# Altium PCB Banker_EDGE_2_DSUB.PCBDOC
Units mm, origin at the board's own origin, x right, y up, seen from the top; angles counter-clockwise.
Board outline 21.4 x 72.8 mm, 2 copper layers (Top, Bot), stack 1.571 mm thick; 15 components, 25 nets, 67 pads, 46 vias.
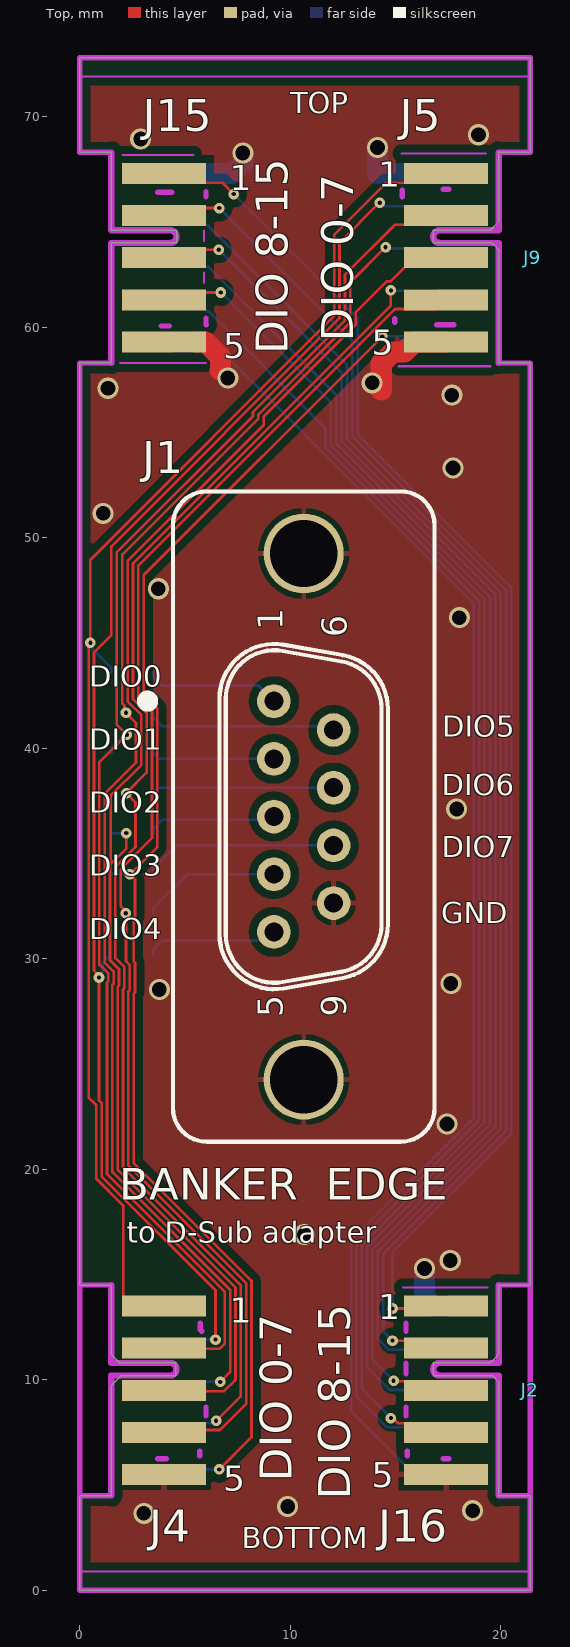
[diagram p0: Top view]
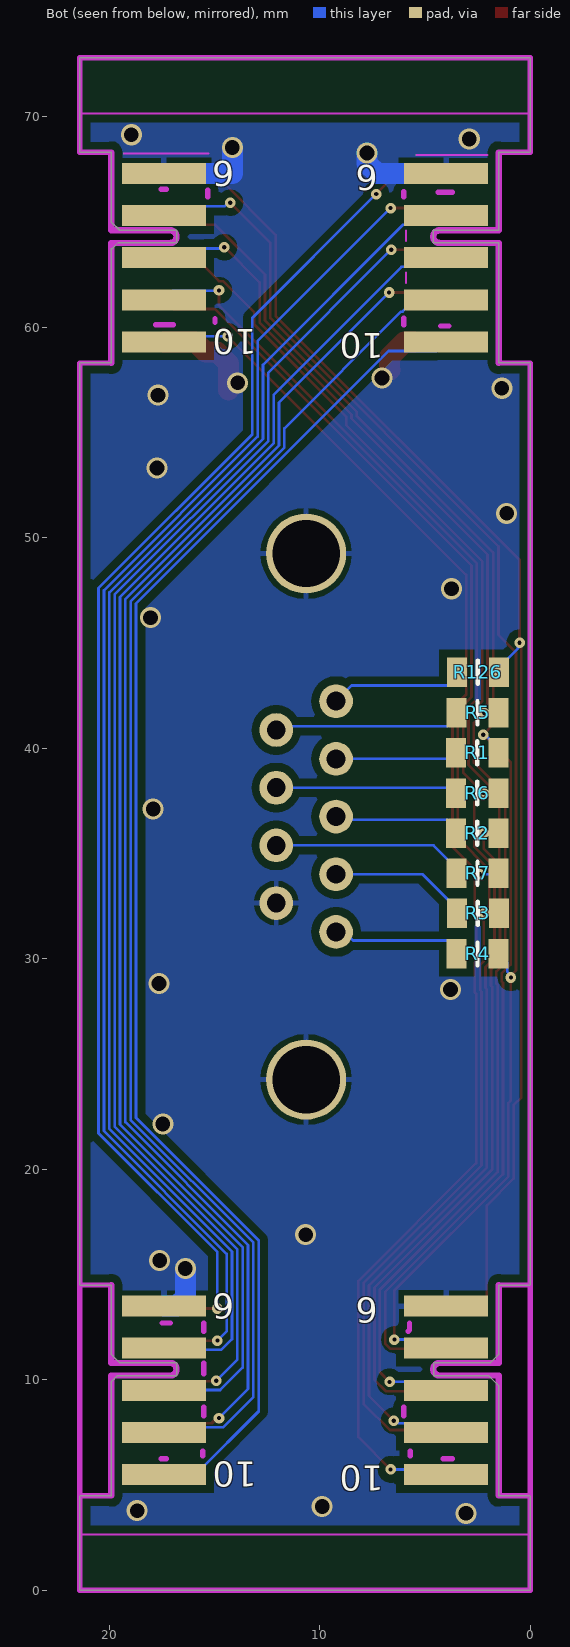
[diagram p1: Bot view, seen from below]
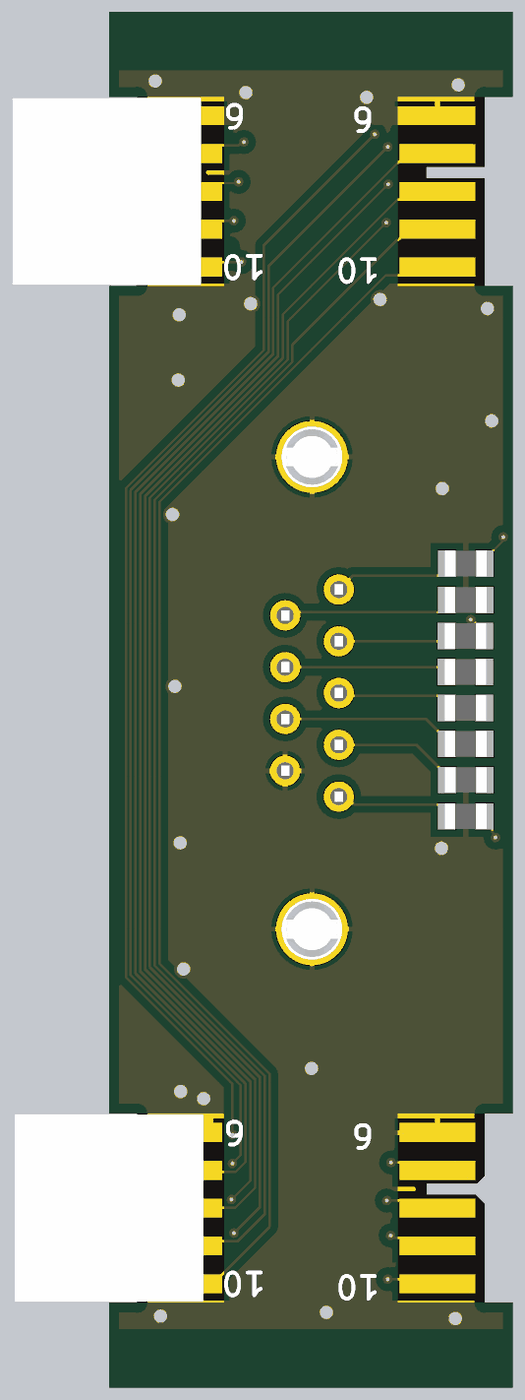
[diagram p2: 3D render of the assembled board from below, using the file's embedded part models]

## Layer stack, top to bottom
TopSolder: solder mask 0.0102, Solder Resist, Dk 3.5
Top: signal copper 0.0356
Dielectric1: core 1.5, FR-4, Dk 4.8
Bot: signal copper 0.0356
BottomSolder: solder mask 0.0102, Solder Resist, Dk 3.5

## Board outline
0,0 0,4.5 1.5,4.5 1.5,9.725 1.975,10.2 4.572,10.2 4.572,10.8 1.9,10.8 1.5,11.2 1.5,14.5 0,14.5 0,58.3 1.5,58.3 1.5,64 4.6,64 4.6,64.6 1.5,64.6 1.5,68.3 0,68.3 0,72.8 21.4,72.8 21.4,68.3 19.9,68.3 19.9,65 19.5,64.6 16.8,64.6 16.8,64 19.6,64 19.8,63.8 19.9,63.7 19.9,58.3 21.4,58.3 21.4,14.5 19.9,14.5 19.9,11.2 19.5,10.8 16.8,10.8 16.8,10.2 19.6,10.2 19.9,9.9 19.9,4.5 21.4,4.5 21.4,0

## Design rules (kind name [scope] priority, off if disabled: settings)
Clearance Clearance_DIFF [(InDifferentialPairClass('All Differential Pairs'))] p1: gap=0.127 ignorepadtopadclearanceinfootprint=FALSE except(0: Arc-Hole Track-Hole SMDPad-Hole THPad-Hole Via-Hole Fill-Hole Poly-Hole Region-Hole Text-Hole; 0.254: Arc-Poly Track-Poly SMDPad-Poly THPad-Poly Via-Poly Fill-Poly Poly-Poly Poly-Region Poly-Text)
Clearance [All] p2: gap=0.127 ignorepadtopadclearanceinfootprint=FALSE except(0: Arc-Hole Track-Hole SMDPad-Hole THPad-Hole Via-Hole Fill-Hole Poly-Hole Region-Hole Text-Hole; 0.381: Arc-Poly Track-Poly SMDPad-Poly THPad-Poly Via-Poly Fill-Poly Poly-Poly)
DiffPairsRouting [All] p1: maxlimit=0.254 minlimit=0.127 mostfreqgap=0.127 toplayer_minwidth=0.127 toplayer_maxwidth=0.381 toplayer_prefwidth=0.254 bottomlayer_minwidth=0.127 bottomlayer_maxwidth=0.381 bottomlayer_prefwidth=0.254 maxuncoupledlength=12.7
FabricationTestPointUsage TestPointUsage [All] p1: valid=0 allowmultiple=FALSE
FabricationTestpoint Testpoint [All] p1: side=3 testpointundercomponent=TRUE minsize=1.016 maxsize=2.54 preferedsize=1.524 minholesize=0.508 maxholesize=1.016 preferedholesize=0.813 testpointgrid=0.025 allowsidetop=TRUE allowsidebottom=TRUE usegrid=TRUE gridtolerance=0
HoleSize [All] p1: absolutevalues=TRUE maxlimit=3.81 minlimit=0.025 maxpercent=80.000 minpercent=20.000
HoleToHoleClearance [All] p1: gap=0.025 allowstackedmicrovias=TRUE
MinimumSolderMaskSliver [All] p1: minsoldermaskwidth=0
PlaneClearance [All] p1: clearance=0.254
PlaneConnect [All] p1: planeconnectstyle=Direct reliefexpansion=0.508 reliefentries=4 reliefconductorwidth=0.254 reliefairgap=0.254
PolygonConnect PolygonConnect_pad [(InPadClass('All Pads'))] p1: connectstyle=Relief reliefconductorwidth=0.254 reliefentries=4 polygonreliefangle="90 Angle" airgapwidth=0.254
PolygonConnect [All] p2: connectstyle=Direct reliefconductorwidth=0.254 reliefentries=4 polygonreliefangle="45 Angle" airgapwidth=0.254
RoomDefinition Banker_EDGE_2_DSUB [InComponentClass('Banker_EDGE_2_DSUB')] p1 off: confinementstyle=ConfineIn formatcopy=TRUE lockcomponents=FALSE outline 65.65,12.65 248.399,12.65 248.399,36.4 65.65,36.4
RoutingVias [All] p1: holewidth=0.2 width=0.5 viastyle="Through Hole" minholewidth=0.2 minwidth=0.5 maxholewidth=0.8 maxwidth=1.3
SilkToSilkClearance [All] p1: silktosilkclearance=0
SilkToSolderMaskClearance SilkscreenOverComponentPads [IsPad] p1: minsilkscreentomaskgap=0 clearancetoexposedcopper=TRUE
SolderMaskExpansion [All] p1: expansion=0.051
Width [All] p1: maxlimit=1.27 minlimit=0.127 preferedwidth=0.127
20 further rules are at their usual default settings.

## Components (designator, comment, footprint, x,y, rotation, side; value= is the part's Value field where it differs from the comment)
J1 "D-Sub" AMPHENOL_L77SDEH09SOL2RM5 10.643,36.754 r90 top
J2 "=Family" "AVX_00 9159 010 061 916" 21.4,9.5 r0 top
J4 "=Family" EDGE10T1B6_P200W1000L0F100X400 4,13.5 r270 top
J5 "=Family" EDGE10T5B10_P200W1000L0F100X400 17.4,59.3 r90 top
J9 "=Family" "AVX_00 9159 010 061 916" 21.527,63.3 r0 top
J15 "=Family" EDGE10T1B6_P200W1000L0F100X400 4,67.3 r270 top
J16 "=Family" EDGE10T5B10_P200W1000L0F100X400 17.4,5.5 r90 top
R1 "39" RESC2012X60N 2.515,39.776 r0 bottom
R2 "39" RESC2012X60N 2.515,35.966 r0 bottom
R3 "39" RESC2012X60N 2.489,32.156 r0 bottom
R4 "39" RESC2012X60N 2.5,30.226 r0 bottom
R5 "39" RESC2012X60N 2.5,41.681 r0 bottom
R6 "39" RESC2012X60N 2.515,37.871 r0 bottom
R7 "39" RESC2012X60N 2.5,34.061 r0 bottom
R126 "39" RESC2012X60N 2.489,43.612 r0 bottom

## Footprints (in the part's own frame and the unit in brackets; to place one, negate y for a bottom-side part, rotate by r counter-clockwise, add the part's x,y. Pads: shape width x height; smd on the part's side, far side on the other; paste and mask are expansions set on the pad)
AMPHENOL_L77SDEH09SOL2RM5 [mm] "Straight D-SUB 9 Female Contacts for PCB with Rear Insert (UNC4-40) and RM5 Standoff Boardlock"
  round 1.6 hole 0.9: 1(5.48,1.42) 2(2.74,1.42) 3(0,1.42) 4(-2.74,1.42) 5(-5.48,1.42) 6(4.11,-1.42) 7(1.37,-1.42) 8(-1.37,-1.42) 9(-4.11,-1.42)
  round 3.8 hole 3.2: 10(-12.495,0) 11(12.495,0)
  silkscreen extent -15.45,-6.21 15.45,7.67, body extent -15.44,-6.21 15.45,6.21, height 13
"AVX_00 9159 010 061 916" [mm] "10 Contacts, 2mm Pitch, Open Ended Card Edge Connector, 9159 Series"
  body extent -5,-4.95 5,4.95, height 1.7
EDGE10T1B6_P200W1000L0F100X400 [mm] "10 contacts Board Edge Connector, First Left Top Pad 1, First Left Bottom Pad 2, Pitch 2mm, Length 0mm, Width 10mm, Finger Lenght 4mm, Finger Width 1mm"
  rect 1x4 smd paste-0.5: 1(0,0) 2(2,0) 3(4,0) 4(6,0) 5(8,0)
  rect 1x4 smd far side paste-0.5: 6(0,0) 7(2,0) 8(4,0) 9(6,0) 10(8,0)
  KeepOutLayer lines w0.3: 9,-2.5 3.3,-2.5 3.3,0.3 ccw(c3,0.3) 2.7,0.3 2.7,-2.5 -1,-2.5
EDGE10T5B10_P200W1000L0F100X400 [mm] "10 contacts Board Edge Connector, First Left Top Pad 5, First Left Bottom Pad 10, Pitch 2mm, Length 0mm, Width 10mm, Finger Lenght 4mm, Finger Width 1mm"
  rect 1x4 smd paste-0.5: 1(8,0) 2(6,0) 3(4,0) 4(2,0) 5(0,0)
  rect 1x4 smd far side paste-0.5: 6(8,0) 7(6,0) 8(4,0) 9(2,0) 10(0,0)
  KeepOutLayer lines w0.3: -1,-2.5 4.7,-2.5 4.7,0.3 cw(c5,0.3) 5.3,0.3 5.3,-2.5 9,-2.5
RESC2012X60N [mm] "Chip Resistor, EIA 0805, Metric 2012, Body 2.0x1.2mm, IPC Medium Density"
  rect 0.95x1.4 smd: 1(-1,0) 2(1,0)
  silkscreen extent 0,-0.55 0,0.55, body extent -1.1,-0.67 1.1,0.68, height 0.6

## Part data
J1: library part AMPHENOL_L77SDEH09SOL2RM5, "Connector D-sub 9 Female", Manufacturer=AMPHENOL, Manufacturer Part Number=L77SDEH09SOL2RM5, Author="CERN DEM JLC", ComponentHeight=13mm, Component Type=Standard, CreateDate=04/06/2012, Family=D-Sub, HelpURL=\\cern.ch\dfs\Applications\Altium\Datasheets\AMPHENOL_L77SDEH09SOL2RM5.pdf, LatestRevisionDate=04/06/2012, Mounted=Yes, Part Description="Straight D-Sub 9 Female Contacts with Rear Insert 4-40 and RM5 Standoff Boardlock", Part Number=AMPHENOL_L77SDEH09SOL2RM5, Pin Count=11, PressFit=No, Sense=No, SMD=No, Socket=No, Status=None
J2 J9: library part "AVX_00 9159 010 061 916", "Open Ended Card Edge Connector, 9159 Series", Manufacturer=AVX, Manufacturer Part Number="00 9159 010 061 916", Author="CERN DEM MR", ComponentHeight=1.6mm, Component Type=Standard, CreateDate=13.02.2018, HelpURL="\\cern.ch\dfs\Applications\Altium\Datasheets\AVX_00 9159 010 061 916.pdf", LatestRevisionDate=13.02.2018, Mounted=Yes, Part Description="10 Contacts, 2mm Pitch, Open Ended Card Edge Connector, 9159 Series", Part Number="AVX_00 9159 010 061 916", Pin Count=10, PressFit=No, Sense=No, SMD=No, Socket=No, Status=None
J4 J15: library part EDGE10T1B6_P200W1000L0F100X400, "PCB Edge Connector 10 (2x5)", Author="CERN DEM MR", ComponentHeight=0mm, Component Type="Standard (No BOM)", CreateDate=14.02.2018, HelpURL=\\cern.ch\dfs\Applications\Altium\Datasheets\EDGE10T1B6_P200W1000L0F100X400.pdf, LatestRevisionDate=14.02.2018, Mounted=No, Part Description="10 Contacts Board Edge Connector, Pitch 2mm, Length 0mm, Width 10mm, Finger Lenght 4mm, Finger Width 1mm", Part Number=EDGE10T1B6_P200W1000L0F100X400, Pin Count=10, PressFit=No, Sense=No, SMD=No, Socket=No, Status=None
J5 J16: library part EDGE10T5B10_P200W1000L0F100X400, "PCB Edge Connector 10 (2x5)", Author="CERN DEM MR", ComponentHeight=0mm, Component Type="Standard (No BOM)", CreateDate=14.02.2018, HelpURL=\\cern.ch\dfs\Applications\Altium\Datasheets\EDGE10T5B10_P200W1000L0F100X400.pdf, LatestRevisionDate=14.02.2018, Mounted=No, Part Description="10 Contacts Board Edge Connector, Pitch 2mm, Length 0mm, Width 10mm, Finger Lenght 4mm, Finger Width 1mm", Part Number=EDGE10T5B10_P200W1000L0F100X400, Pin Count=10, PressFit=No, Sense=No, SMD=No, Socket=No, Status=None
R1 R2 R3 R4 R5 R6 R7 R126: library part R0805_39R_1%_0.125W_100PPM, "Resistor - 1%", Case=0805, Manufacturer=GENERIC, Manufacturer1 ComponentHeight=0.6mm, Manufacturer1 Example="NIC COMPONENT", Manufacturer1 Part Number=NRC10F39R0TRF, Power=0.125W, Tolerance=±1%, Author="CERN DEM JLC", Component Type=Standard, CreateDate=03/12/2007, HelpURL=\\cern.ch\dfs\Applications\Altium\Datasheets\R0805_NIC_NRC.pdf, LatestRevisionDate=13/03/2008, Manufacturer Part Number=R0805_39R_1%_0.125W_100PPM, Mounted=Yes, Part Description="General Purpose Thick Film Chip Resistor", Part Number=R0805_39R_1%_0.125W_100PPM, Pin Count=2, PressFit=No, Sense=No, SMD=Yes, Socket=No, Status=Preferred, TC=±100ppm/°C

## Via types
v1: diameter 0.5, hole 0.2, Top to Bot, tented both sides, 24 vias
v2: diameter 1, hole 0.7, Top to Bot, tented both sides, 22 vias

## Nets (pads, with @x,y where several pads share a name; then routed paths per layer and width w, separated by ;. In a path a pad name is that pad's centre, name@x,y a point inside that pad or via, vN(x,y) a via of type N, cw(c..) or ccw(c..) an arc to the next point about the centre after c; other vN are vias at no path point)
EDGE0_DIO0: J4.1 J5.1 R126.1 | length 66.4
  Top w0.127: J4.1 2.5,13.5 2.064,13.937 2.064,18.282 0.787,19.558 0.787,23.049 0.423,23.413 0.423,44.823 0.533,44.933 0.533,45.009 0.508,45.034 0.508,48.952 12.09,60.535 12.09,64.377 14.577,66.863 16.963,66.863 J5.1
  Bot w0.127: v1(0.508,45.009) 0.579,44.937 0.579,44.747 1.489,43.837 R126.1
EDGE0_DIO1: J4.2 J5.2 R1.1 | length 68.7
  Top w0.127: J4.2 4.028,11.472 6.634,11.472 6.892,11.73 6.892,14.172 1.295,19.769 1.295,28.863 1.358,28.926 1.358,29.291 0.931,29.718 0.931,39.336 2.215,40.619 2.215,40.661 1.76,41.116 1.76,49.294 8.234,55.769 8.234,55.96 12.598,60.324 12.598,62.493 14.969,64.863 15.463,64.863 15.9,65.3 J5.2
  Bot w0.127: R1.1 1.515,40.001 2.153,40.64 v1(2.235,40.64)
EDGE0_DIO2: J4.3 J5.3 R2.1 | length 70.1
  Top w0.127: v1(2.215,35.966) 2.215,35.235 1.473,34.493 ; J4.3 4.041,9.459 6.863,9.459 7.4,9.997 7.4,14.382 1.803,19.979 1.803,28.653 1.866,28.716 1.866,29.501 1.439,29.928 1.439,34.459 1.473,34.493 ; J5.3 15.9,63.3 14.788,62.188 14.6,62.188 13.106,60.694 13.106,60.114 8.742,55.75 8.742,55.346 2.281,48.885 2.281,42.223 2.93,41.575 2.93,39.209 1.473,37.753 1.473,34.493
  Bot w0.127: R2.1 v1(2.215,35.966)
EDGE0_DIO3: J4.4 J5.4 R3.1 | length 67.5
  Top w0.127: J4.4 4.111,7.611 6.659,7.611 7.908,8.86 7.908,14.593 2.311,20.189 2.311,28.442 2.374,28.505 2.374,29.712 2.2,29.886 2.2,32.247 1.947,32.499 1.947,34.249 3.438,35.739 3.438,41.785 2.789,42.433 2.789,48.675 14.978,60.863 16.963,60.863 J5.4
  other v1: 2.189,32.156
EDGE0_DIO4: J4.7 J5.7 R4.1 | length 69.4
  Top w0.127: v1(6.452,11.913) 6.452,14.253 1.041,19.663 1.041,23.154 0.918,23.277 0.918,29.086 0.94,29.108 0.94,29.187 0.677,29.45 0.677,44.555 1.506,45.383 1.506,49.59 12.344,60.429 12.344,64.008 v1(14.249,65.913)
  Bot w0.127: v1(0.918,29.108) 0.918,29.209 1.089,29.38 1.089,29.814 R4.1 ; J4.7 4.413,11.913 v1(6.452,11.913) ; v1(14.249,65.913) 14.35,65.913 14.527,65.736 16.963,65.736 J5.7
EDGE0_DIO5: J4.8 J5.8 R5.1 | length 68.6
  Top w0.127: v1(6.68,9.9) 7.146,10.366 7.146,14.277 1.549,19.874 1.549,28.758 1.612,28.821 1.612,29.396 1.185,29.823 1.185,37.824 2.676,39.315 2.676,41.206 2.233,41.648 2.167,41.648 2.129,41.686 2.129,42.017 2.027,42.118 2.027,49.202 8.488,55.663 8.488,55.855 12.852,60.219 12.852,62.124 v1(14.529,63.8)
  Bot w0.127: J4.8 5.537,9.5 5.937,9.9 v1(6.68,9.9) ; v1(14.529,63.8) 14.592,63.736 15.463,63.736 15.9,63.3 J5.8
  other v1: 2.2,41.681
EDGE0_DIO6: J4.9 J5.9 R6.1 | length 68.5
  Top w0.127: v1(6.477,8.052) 7.654,9.229 7.654,14.487 2.057,20.084 2.057,28.548 2.12,28.61 2.12,29.606 1.693,30.034 1.693,34.354 2.655,35.316 2.655,37.431 2.235,37.851 2.235,37.892 3.184,38.84 3.184,41.68 2.535,42.328 2.535,48.78 14.783,61.028 v1(14.783,61.747)
  Bot w0.127: J4.9 4.437,7.937 6.261,7.937 6.376,8.052 v1(6.477,8.052) ; v1(14.783,61.747) 14.794,61.736 16.963,61.736 J5.9
  other v1: 2.215,37.871
EDGE0_DIO7: J4.10 J5.10 R7.1 | length 69.2
  Top w0.127: v1(6.629,5.74) 8.162,7.273 8.162,14.698 2.565,20.295 2.565,28.337 2.628,28.4 2.628,29.817 2.565,29.88 2.565,31.91 2.63,31.974 2.63,33.768 v1(2.388,34.011) 3.692,35.315 3.692,41.89 3.043,42.539 3.043,48.23 v1(14.376,59.563)
  Bot w0.127: R7.1 1.551,34.011 v1(2.388,34.011) ; J4.10 4.24,5.74 v1(6.629,5.74) ; v1(14.376,59.563) 17.137,59.563 J5.10
EDGE1_DIO0: J15.1 J16.1 | length 67
  Top w0.127: J15.1 4.437,66.863 6.771,66.863 v1(7.315,66.319) ; v1(14.859,13.386) 17.286,13.386 J16.1
  Bot w0.127: v1(7.315,66.319) 13.203,60.431 13.203,54.905 20.503,47.606 20.503,21.711 14.859,16.067 v1(14.859,13.386)
EDGE1_DIO1: J15.2 J16.2 | length 67.5
  Top w0.127: J15.2 4.359,65.659 v1(6.629,65.659) ; v1(14.859,11.862) 17.038,11.862 J16.2
  Bot w0.127: v1(6.629,65.659) 12.949,59.339 12.949,54.8 20.249,47.501 20.249,21.816 14.419,15.986 14.419,12.302 v1(14.859,11.862)
EDGE1_DIO2: J15.3 J16.3 | length 67.4
  Top w0.127: J15.3 5.559,63.3 5.937,63.678 v1(6.604,63.678) ; v1(14.91,9.957) 14.93,9.936 15.464,9.936 15.9,9.5 J16.3
  Bot w0.127: v1(6.604,63.678) 12.441,57.841 12.441,54.59 19.741,47.29 19.741,22.026 13.911,16.196 13.911,10.956 v1(14.91,9.957)
EDGE1_DIO3: J15.4 J16.4 | length 67.4
  Top w0.127: J15.4 4.346,61.646 v1(6.706,61.646) ; v1(14.783,8.179) 14.884,8.179 15.126,7.936 16.964,7.936 J16.4
  Bot w0.127: v1(6.706,61.646) 11.933,56.418 11.933,54.379 19.233,47.08 19.233,22.237 13.403,16.407 13.403,9.559 v1(14.783,8.179)
EDGE1_DIO4: J15.7 J16.7 | length 66.8
  Bot w0.127: J15.7 5.5,65.3 5.937,64.863 6.041,64.863 12.695,58.209 12.695,54.695 19.995,47.396 19.995,21.921 14.165,16.091 14.165,11.933 14.677,11.421 17.321,11.421 J16.7
EDGE1_DIO5: J15.8 J16.8 | length 66.7
  Bot w0.127: J15.8 4.437,62.863 6.111,62.863 12.187,56.787 12.187,54.484 19.487,47.185 19.487,22.131 13.657,16.301 13.657,10.587 14.727,9.516 17.384,9.516 J16.8
EDGE1_DIO6: J15.9 J16.9 | length 66.6
  Bot w0.127: J15.9 5.5,61.3 6.064,60.736 6.132,60.736 11.679,55.189 11.679,54.274 18.979,46.975 18.979,22.342 13.149,16.512 13.149,9.19 14.6,7.738 17.162,7.738 J16.9
EDGE1_DIO7: J15.10 J16.10 | length 66.4
  Bot w0.127: J15.10 4.437,58.863 6.731,58.863 18.725,46.87 18.725,22.447 12.895,16.617 12.895,8.506 15.9,5.5 J16.10
GND: J1.9 J1.10 J1.11 J4.5 J4.6 J5.5 J5.6 J15.5 J15.6 J16.5 J16.6 | length 16.9
  Top w1: J15.5@5.5,59.3 5.965,59.3 6.685,58.58 6.685,57.989 6.655,57.959 ; 14.326,57.023 14.326,58.268 14.877,58.819 15.419,58.819 15.9,59.3 J5.5
  Bot w1: J15.6 7.264,67.3 7.747,67.783 v2(7.747,68.275) ; v2(14.148,68.529) 14.148,67.3 J5.6@15.9,67.3 ; v2(16.383,15.291) 16.383,13.906 16.789,13.5 J16.6
  other v2: 3.047,3.658 18.669,3.785 9.881,3.982 17.602,15.672 10.668,16.891 17.45,22.149 3.785,28.542 17.628,28.829 17.907,37.109 18.034,46.203 3.734,47.574 1.118,51.156 17.729,53.315 17.678,56.769 1.346,57.099 13.894,57.353 7.036,57.582 2.896,68.936 18.948,69.139
NetJ1_1: J1.1 R126.2 | length 6.4
  Bot w0.127: R126.2 3.489,43.387 3.901,42.975 8.481,42.975 J1.1
NetJ1_2: J1.2 R1.2 | length 5.8
  Bot w0.127: R1.2 3.797,39.494 J1.2
NetJ1_3: J1.3 R2.2 | length 6.2
  Bot w0.127: R2.2 3.515,36.191 3.926,36.603 9.072,36.603 J1.3
NetJ1_4: J1.4 R3.2 | length 6.6
  Bot w0.127: R3.2 3.489,32.381 5.122,34.014 J1.4
NetJ1_5: J1.5 R4.2 | length 6.3
  Bot w0.127: R4.2 3.5,30.451 3.912,30.862 8.413,30.862 8.824,31.274 J1.5
NetJ1_6: J1.6 R5.2 | length 9
  Bot w0.127: R5.2 3.5,41.456 3.912,41.045 11.882,41.045 J1.6
NetJ1_7: J1.7 R6.2 | length 8.7
  Bot w0.127: R6.2 3.767,38.124 J1.7
NetJ1_8: J1.8 R7.2 | length 9.2
  Bot w0.127: R7.2 3.5,34.286 4.597,35.384 J1.8

## Polygon pours and split planes (outlines as drawn)
GND on Bot "Bot-GND" (solid, remove dead copper, pour order 6): 0,70.15 21.4,70.15 21.4,2.65 0,2.65
GND on Top "Top-GND" (solid, remove dead copper, pour order 4): 0,72.8 21.4,72.8 21.4,1 21.3,0.9 0,0.9

## Keep-outs
Top:
  lines w0.1: 0,0.9 21.3,0.9 ; 0,71.9 21.4,71.9 ; 1.912,58.3 6.008,58.3 ; 15.158,58.142 19.519,58.142 ; 15.358,14.381 19.359,14.381
Bot:
  lines w0.1: 0,2.65 21.4,2.65 ; 0,70.15 21.4,70.15
  lines w0.254: 17.1,12.7 17.481,12.7
KeepOutLayer:
  lines w0.1: 2.041,68.181 5.403,68.181 ; 5.9,62.1 5.9,62.6 ; 5.9,64.1 5.9,64.6 ; 15.291,68.25 19.29,68.25
  lines w0.254: 0,0.35 0,0 ; 0,14.5 1.5,14.5 ; 0.1,4.5 1.5,4.5 ; 1.5,58.3 0,58.3 0,43.8 0,0.15 ; 1.5,68.3 0,68.3 0,72.8 21.4,72.8 21.4,68.3 19.9,68.3 ; 3.704,6.254 4.127,6.254 ; 3.703,66.4 4.375,66.4 ; 3.873,60.054 4.254,60.054 ; 5.7,6.4 5.7,6.619 ; 5.734,12.7 5.734,12.366 5.8,12.3 ; 6,8.3 6,8.7 ; 6,60.419 6,60.108 6.008,60.1 ; 6,66.181 6,66.446 ; 14.974,60.226 14.974,60.41 ; 15.323,66.2 15.323,66.5 ; 15.5,8.3 15.5,8.7 ; 15.5,10.292 15.5,10.8 ; 15.5,12.3 15.5,12.7 ; 15.554,6.4 15.554,6.619 ; 16.963,60.108 17.784,60.108 ; 17.273,6.254 17.527,6.254 ; 17.273,66.546 17.527,66.546 ; 19.9,4.5 21.35,4.5 ; 19.9,14.5 21.3,14.5 ; 19.9,58.3 21.4,58.3 21.4,0 0,0 ; 0,0 0,0.15 ; 0,0.15 0,0.15

## Silkscreen, mask and mechanical layers (free items; w line width, h text height)
TopOverlay:
  text "TOP" at 10,70.15 h1
  text "DIO 0-7" at 13,59.3 h1.52 r90
  text "DIO 8-15" at 9.881,58.725 h1.52 r90
  text "DIO0" at 0.457,42.926 h1
  text "DIO5" at 17.221,40.538 h1
  text "DIO1" at 0.457,39.929 h1
  text "DIO6" at 17.196,37.77 h1
  text "DIO2" at 0.457,36.932 h1
  text "DIO7" at 17.196,34.823 h1
  text "DIO3" at 0.457,33.934 h1
  text "GND" at 17.17,31.674 h1
  text "DIO4" at 0.457,30.937 h1
  text "BANKER  EDGE" at 1.88,18.542 h1.5
  text "to D-Sub adapter" at 2.235,16.51 h1
  text "DIO 0-7" at 10.079,5.15 h1.52 r90
  text "DIO 8-15" at 12.856,4.293 h1.52 r90
  text "BOTTOM" at 7.694,2 h1
Mechanical1:
  lines w0.2: 0,14.5 0,14.5
  lines w0.254: 0,0 0,4.5 1.5,4.5 1.5,9.725 1.975,10.2 4.572,10.2 4.572,10.8 1.9,10.8 1.5,11.2 1.5,14.5 0,14.5 0,58.3 1.5,58.3 1.5,64 4.6,64 4.6,64.6 1.5,64.6 1.5,68.3 0,68.3 0,72.8 21.4,72.8 21.4,68.3 19.9,68.3 19.9,65 19.5,64.6 16.8,64.6 16.8,64 19.6,64 19.8,63.8 19.9,63.7 19.9,58.3 21.4,58.3 21.4,14.5 19.9,14.5 19.9,11.2 19.5,10.8 16.8,10.8 16.8,10.2 19.6,10.2 19.9,9.9 19.9,4.5 21.4,4.5 21.4,0 0,0

## Text inside footprints (layer, text, board x,y; h text height)
J1: TopOverlay "9" at 12.668,27.254 h1.2 r90; TopOverlay "6" at 12.693,45.279 h1.2 r90; TopOverlay "5" at 9.643,27.229 h1.2 r90; TopOverlay "1" at 9.643,45.604 h1.2 r90; Mechanical14 "1" at 9.643,45.604 h1.2 r90; Mechanical14 "5" at 9.643,27.229 h1.2 r90; Mechanical14 "6" at 12.693,45.279 h1.2 r90; Mechanical14 "9" at 12.668,27.254 h1.2 r90
J4: TopOverlay "1" at 7.125,12.7 h1.2; TopOverlay "5" at 6.825,4.72 h1.2; BottomOverlay "6" at 7.25,13.9 h1.2 r180; BottomOverlay "10" at 6.95,5.92 h1.2 r180
J5: TopOverlay "5" at 13.875,58.7 h1.2; TopOverlay "1" at 14.175,66.68 h1.2; BottomOverlay "10" at 13,59.9 h1.2 r180; BottomOverlay "6" at 14.05,67.88 h1.2 r180
J15: TopOverlay "1" at 7.125,66.5 h1.2; TopOverlay "5" at 6.825,58.52 h1.2; BottomOverlay "6" at 7.25,67.7 h1.2 r180; BottomOverlay "10" at 6.95,59.72 h1.2 r180
J16: TopOverlay "5" at 13.875,4.9 h1.2; TopOverlay "1" at 14.175,12.88 h1.2; BottomOverlay "10" at 13,6.1 h1.2 r180; BottomOverlay "6" at 14.05,14.08 h1.2 r180